# Altium PCB passwordManager.PcbDoc
Units mil, origin at the board's own origin, x right, y up, seen from the top; angles counter-clockwise.
Board outline 2340 x 1800 mil, 2 copper layers (Top Layer, Bottom Layer); 45 components, 29 nets, 171 pads, 15 vias.
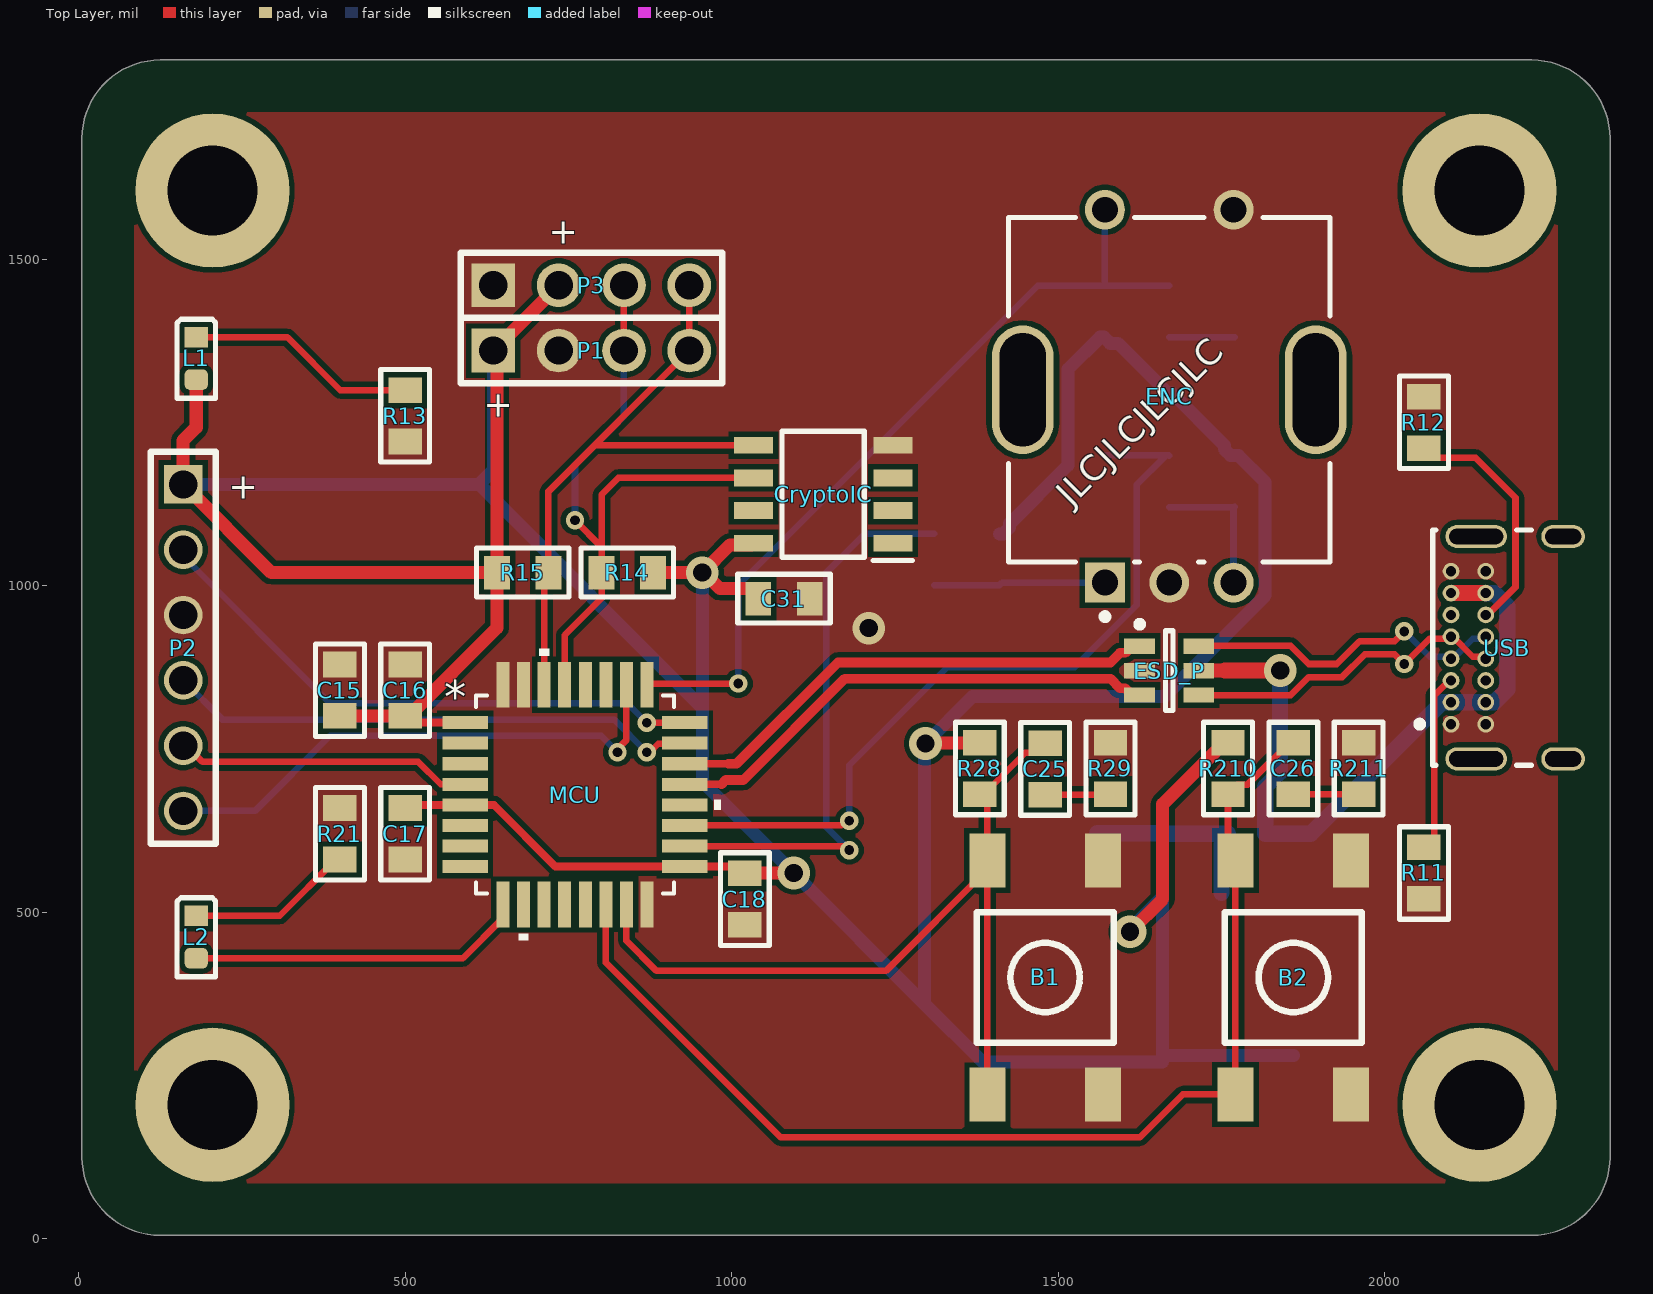
[diagram p0: Top Layer view]
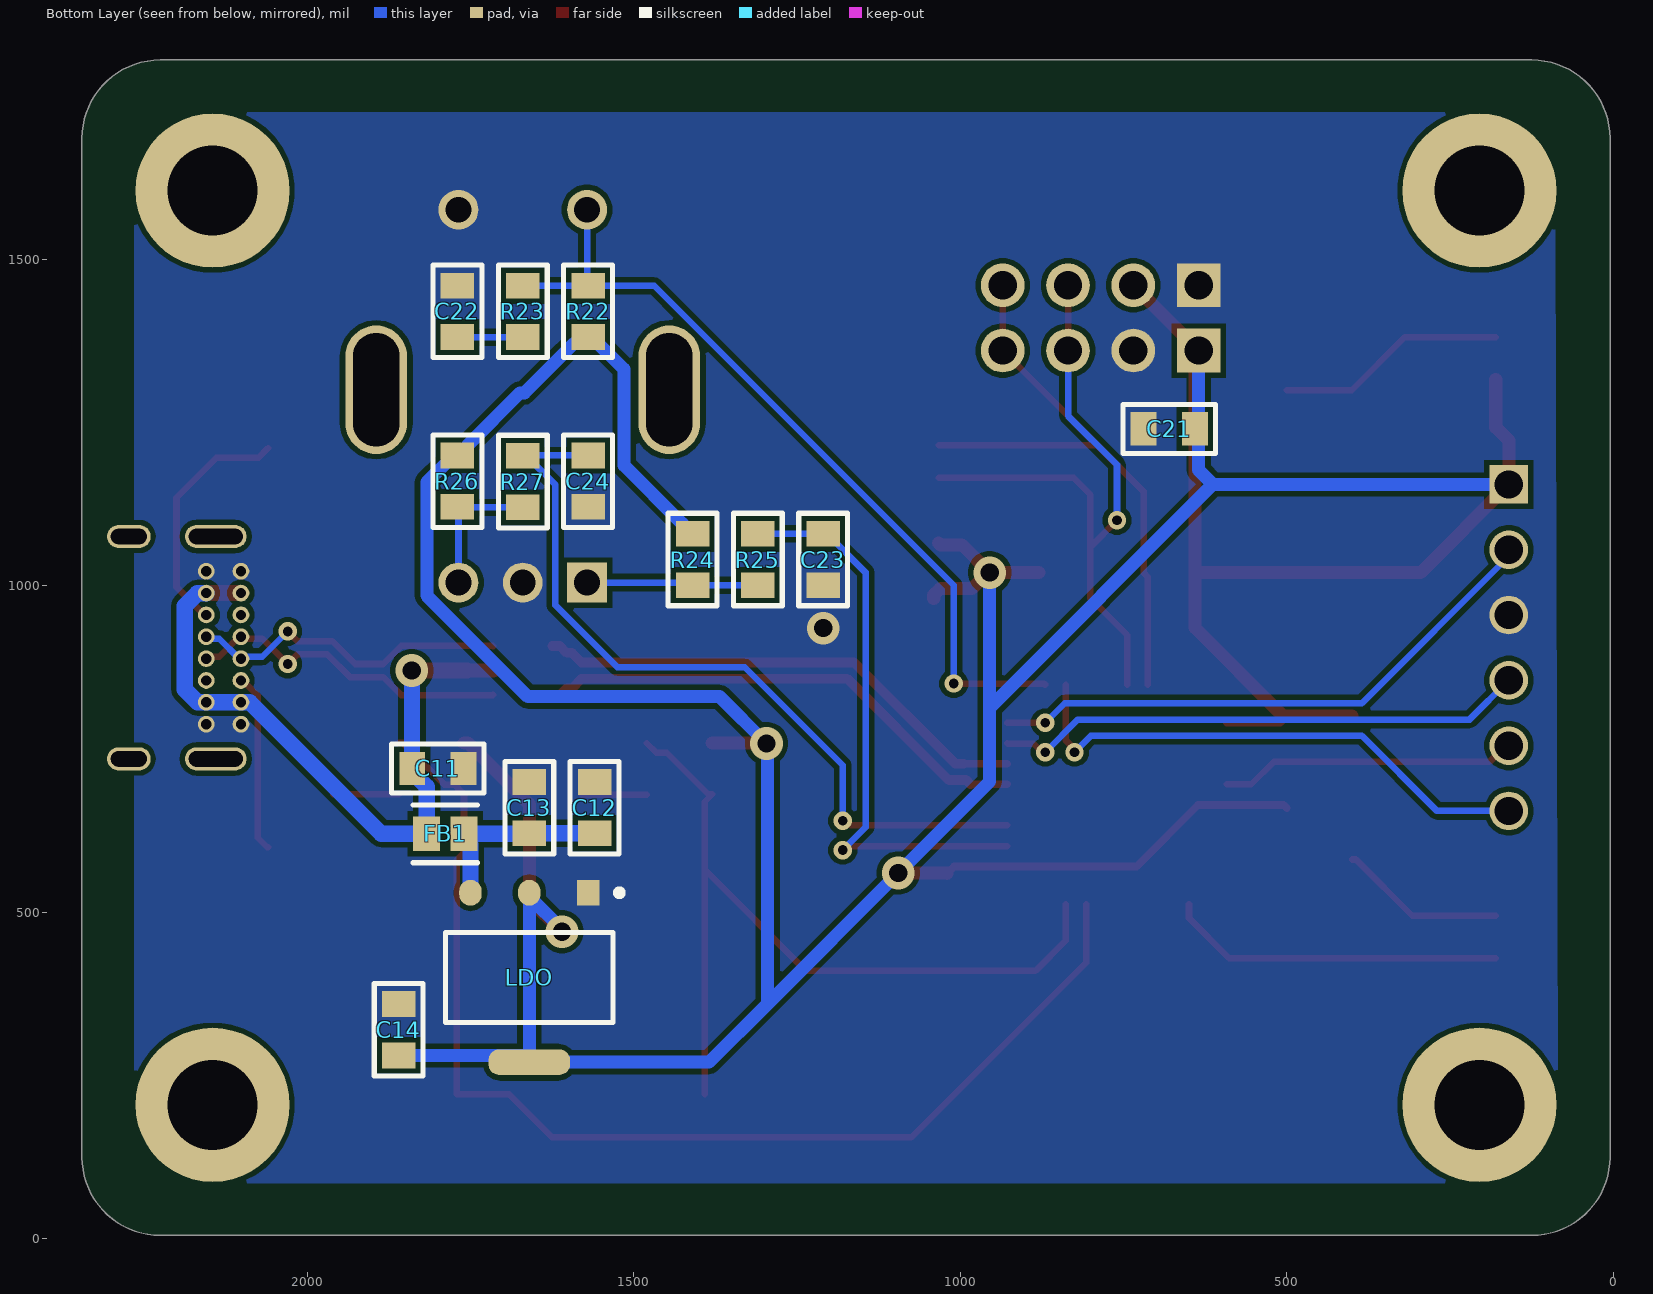
[diagram p1: Bottom Layer view, seen from below]
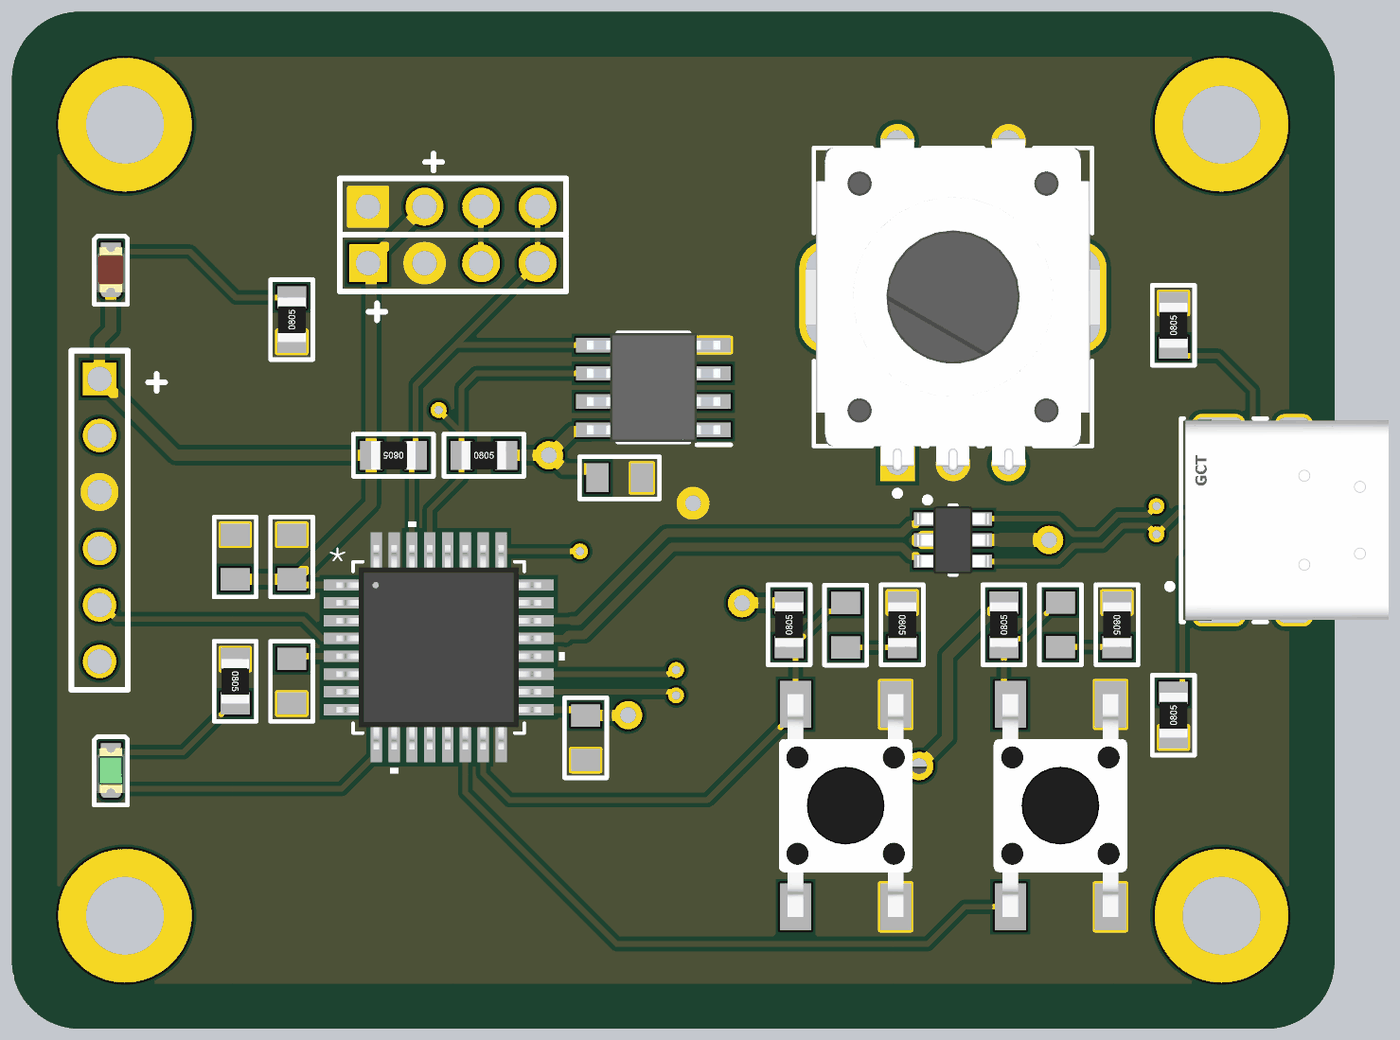
[diagram p2: 3D render of the assembled board from above, using the file's embedded part models]
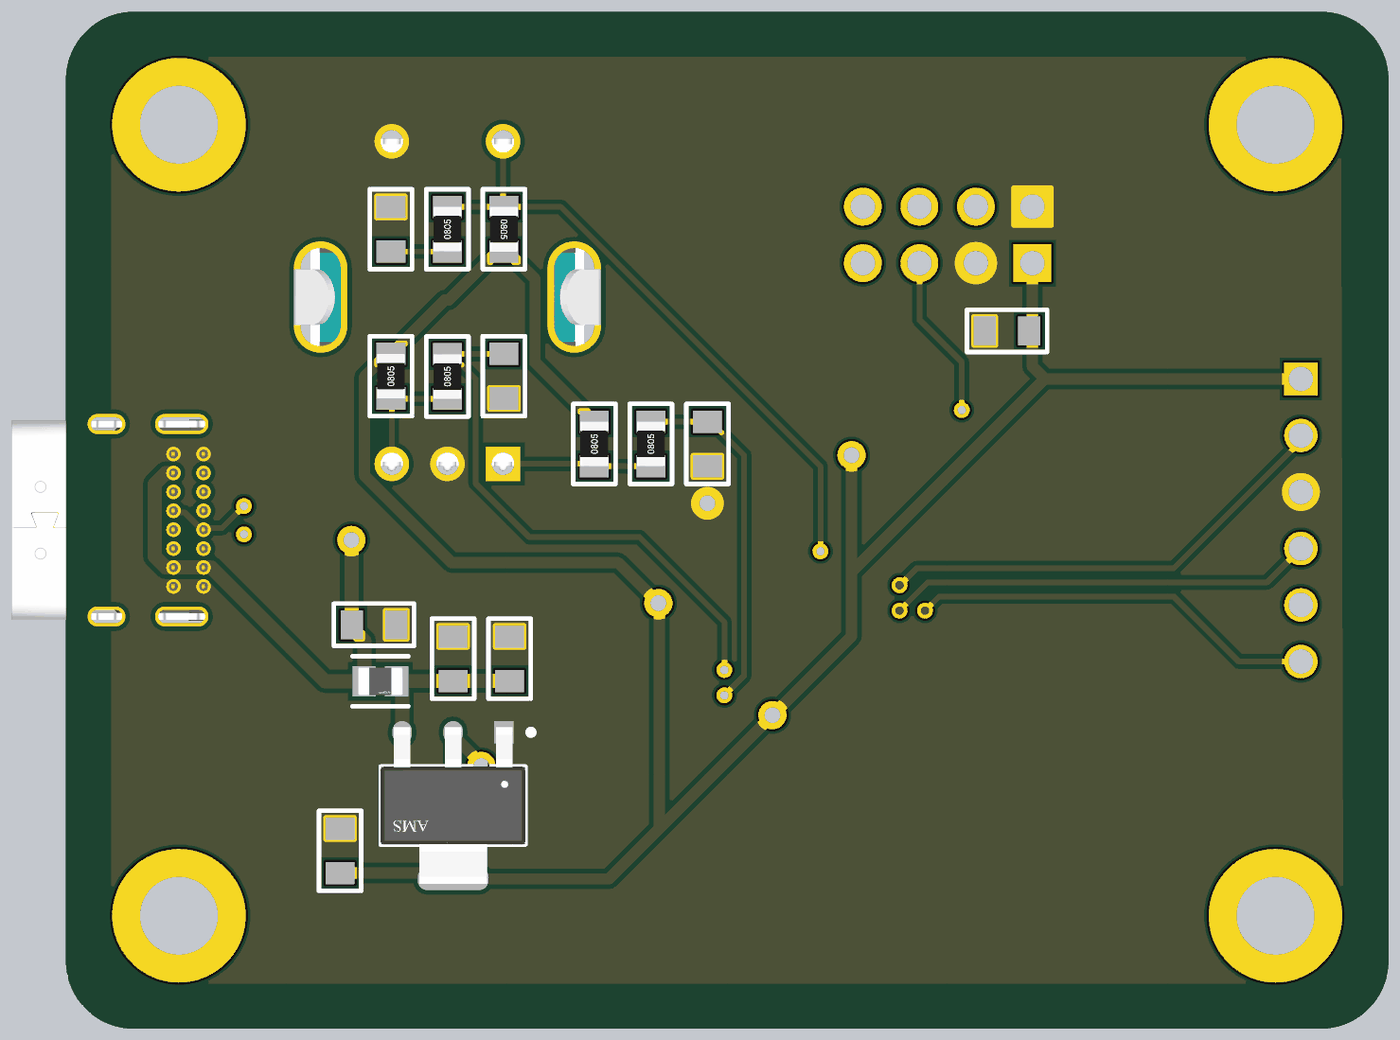
[diagram p3: 3D render of the assembled board from below, using the file's embedded part models]

## Layer stack, top to bottom
Top Solder: solder mask 0.4, Solder Resist, Dk 3.5
Top Layer: signal copper 1.4
Dielectric 1: dielectric 12.6, FR-4, Dk 4.8
Bottom Layer: signal copper 1.4
Bottom Solder: solder mask 0.4, Solder Resist, Dk 3.5

## Board outline
5,125 5,1685 cw(c125,1685) 125,1805 2225,1805 cw(c2225,1685) 2345,1685 2345,125 cw(c2225,125) 2225,5 125,5 cw(c125,125)

## Design rules (kind name [scope] priority, off if disabled: settings)
Clearance [All] p1: gap=7.87 ignorepadtopadclearanceinfootprint=FALSE
DiffPairsRouting [All] p1: maxlimit=10 minlimit=10 mostfreqgap=10 toplayer_minwidth=10 toplayer_maxwidth=15 toplayer_prefwidth=15 bottomlayer_minwidth=10 bottomlayer_maxwidth=15 bottomlayer_prefwidth=15 maxuncoupledlength=500
HoleSize [All] p1: absolutevalues=TRUE maxlimit=200 minlimit=10 maxpercent=80.000 minpercent=20.000
MinimumSolderMaskSliver [All] p1: minsoldermaskwidth=5
PolygonConnect [All] p1: connectstyle=Direct reliefconductorwidth=10 reliefentries=4 polygonreliefangle="90 Angle" airgapwidth=10
RoutingVias [All] p1: holewidth=15 width=28 viastyle="Through Hole" minholewidth=15 minwidth=28 maxholewidth=28 maxwidth=50
SMDNeckDown [All] p1: percent=100.000
SilkToSilkClearance [All] p1: silktosilkclearance=7.87
SilkToSolderMaskClearance [IsPad] p1: minsilkscreentomaskgap=7.87 clearancetoexposedcopper=TRUE
SolderMaskExpansion [All] p1: expansion=4 istentingtop=FALSE
Width [All] p1: maxlimit=50 minlimit=10 preferedwidth=10 minimp=50.000000 maximp=50.000000 favimp=50.000000
25 further rules are at their usual default settings.

## Classes and differential pairs
component class Pwr&MCU: C11 C12 C13 C14 C15 C16 C17 C18 ESD_P FB1 L1 LDO MCU R11 R12 R13 R14 R15 USB
component class Peripherals: 22 B1 B2 C21 C22 C23 C24 C25 C26 ENC L2 P1 P2 R21 R22 R23 R24 R25 R26 R27 R28 R29 R210 R211
component class cryptoIC: C31 CryptoIC
differential pair USB_D: +USB_D_P -USB_D_N
differential pair USB_CONN_D: +USB_CONN_D_P -USB_CONN_D_N

## Components (designator, comment, footprint, x,y, rotation, side; value= is the part's Value field where it differs from the comment)
B1 "Button" FP_BTN_SMD 1480,400 r0 top locked
B2 "Button" FP_BTN_SMD 1860,400 r0 top locked
C11 "2u2" FP_0805_CAP_085 1800,720 r0 bottom locked
C12 "2u2" FP_0805_CAP_085 1560,660 r270 bottom locked
C13 "22u" FP_0805_CAP_085 1660,660 r270 bottom locked
C14 "22u" FP_0805_CAP_085 1860,320 r270 bottom locked
C15 "4u7" FP_0805_CAP_085 400,840 r270 top locked
C16 "100n" FP_0805_CAP_085 500,840 r270 top locked
C17 "100n" FP_0805_CAP_085 500,620 r90 top locked
C18 "100n" FP_0805_CAP_085 1020,520 r90 top locked
C21 "100n" FP_0805_CAP_085 680,1240 r180 bottom locked
C22 "100n" FP_0805_CAP_085 1770,1420 r270 bottom locked
C23 "100n" FP_0805_CAP_085 1210,1040 r90 bottom locked
C24 "100n" FP_0805_CAP_085 1570,1160 r90 bottom locked
C25 "100n" FP_0805_CAP_085 1480,719.37 r90 top locked
C26 "100n" FP_0805_CAP_085 1860,720 r90 top locked
C31 "100n" FP_0805_CAP_085 1080,980 r180 top locked
CryptoIC "ATECC508A-SSHDA-B" SOIC127P600X175-8N 1140,1140 r180 top locked
ENC "PEC11R-4215F-S0024" FP-PEC11R-4215F-S0024-MFG 1670,1300 r0 top locked
ESD_P "USBLC6-2SC6" STM-SOT23-6L_V 1670,870 r0 top locked
FB1 "BLM21PG121SN1D" FP-BLM21-0_2-t0_85-e0_5-d-IPC_C 1788.57,620 r180 bottom locked
L1 "PWR_LED" FP_0805_LED_RED 180,1347.98 r90 top locked
L2 "U_LED" FP_0805_LED_GREEN 180,462.02 r90 top locked
LDO "AMS1117-3.3" FP-AMS1117-IPC_C 1660,400 r270 bottom locked
MCU "STM32L422KBT6" LQFP_422KBT6_STM 760,680 r0 top locked
P1 "Connector" FP_CONN4_TUSKE_254MM 635,1360 r270 top
P2 "Header" HEADER6x1 160,1155 r0 top locked
P3 "Connector" FP_CONN4_TUSKE_254MM 635,1460 r270 top (schematic designator P1)
R11 "5k1" FP_0805_RES 2060,560 r90 top locked
R12 "5k1" FP_0805_RES 2060,1250 r90 top locked
R13 "1k" FP_0805_RES 500,1260 r90 top locked
R14 "5k1" FP_0805_RES 840,1020 r0 top
R15 "5k1" FP_0805_RES 680,1020 r180 top
R21 "1k" FP_0805_RES 400,620 r270 top locked
R22 "5k1" FP_0805_RES 1570,1420 r270 bottom locked
R23 "100" FP_0805_RES 1670,1420 r90 bottom locked
R24 "5k1" FP_0805_RES 1410,1040 r90 bottom locked
R25 "5k1" FP_0805_RES 1310,1040 r90 bottom locked
R26 "5k1" FP_0805_RES 1770,1160 r90 bottom locked
R27 "5k1" FP_0805_RES 1670,1159.37 r90 bottom locked
R28 "5k1" FP_0805_RES 1380,720 r90 top locked
R29 "100" FP_0805_RES 1580,720 r270 top locked
R210 "5k1" FP_0805_RES 1760,720 r90 top locked
R211 "100" FP_0805_RES 1960,720 r270 top locked
USB "USB4085-GF-A" FP-USB4085-GF-A-MFG 2260,905 r90 top locked

## Footprints (in the part's own frame and the unit in brackets; to place one, negate y for a bottom-side part, rotate by r counter-clockwise, add the part's x,y. Pads: shape width x height; smd on the part's side, far side on the other; paste and mask are expansions set on the pad)
FP-AMS1117-IPC_C [mm]
  rect 1.004x0.872 smd paste+0 mask+0: 1(-3.295,2.29)
  rrect100% 1.004x0.872 smd paste+0 mask+0: 2(-3.295,0) 3(-3.295,-2.29)
  rrect87% 1.004x3.182 smd paste+0 mask+0: 4(3.295,0)
  silkscreen extent -3.42,-3.25 1.75,3.62, body extent -3.53,-3.25 3.53,3.25, height 1.8
FP-BLM21-0_2-t0_85-e0_5-d-IPC_C [mil]
  rect 41.53x53.39 smd paste+0 mask+0: 1(-28.57,0) 2(28.57,0)
  silkscreen extent -49,-44 49,44, body extent -39,-25 39,25, height 41
FP-PEC11R-4215F-S0024-MFG [mm]
  round 1.55 hole 1 paste-1000 mask+0: 1(-2.5,7) 2(2.5,7) B(2.5,-7.5) C(0,-7.5)
  rrect100% 2.4x5 hole 4.4 slot 1.8 at 0 deg paste-1000 mask+0: 3(-5.7,0) 4(5.7,0)
  rect 1.55x1.55 hole 1 paste-1000 mask+0: A(-2.5,-7.5)
  silkscreen extent -6.25,-8.95 6.25,6.7, body extent -7,-8.37 7,7.88, height 0.25
FP-USB4085-GF-A-MFG [mm]
  rrect100% 0.9x2.4 hole 2.1 slot 0.6 at 0 deg paste-1000 mask+0: 1(-4.325,3.045) 2(4.325,3.045)
  rrect100% 0.9x1.7 hole 1.4 slot 0.6 at 0 deg paste-1000 mask+0: 3(-4.325,-0.335) 4(4.325,-0.335)
  round 0.65 hole 0.4 paste-1000 mask+0: A1(-2.975,4.025) A4(-2.125,4.025) A5(-1.275,4.025) A6(-0.425,4.025) A7(0.425,4.025) A8(1.275,4.025) A9(2.125,4.025) A12(2.975,4.025) B1(2.975,2.675) B4(2.125,2.675) B5(1.275,2.675) B6(0.425,2.675) B7(-0.425,2.675) B8(-1.275,2.675) B9(-2.125,2.675) B12(-2.975,2.675)
  silkscreen extent -4.57,0.89 4.57,5.37, body extent -4.87,-4.83 4.87,4.83, height 0.25
FP_0805_CAP_085 [mm] "0805 kapacitás YAGEO 0.85mm magas"
  rect 1x1.3 smd: 1(-1,0) 2(1,0)
  silkscreen extent -1.8,-0.95 1.8,0.95, body extent -1,-0.64 1.03,0.64, height 0.85
FP_0805_LED_GREEN [mm] "0805 méretû zöld LED"
  rrect50% 0.8x0.9 smd: A(-0.825,0)
  rect 0.8x0.9 smd: K(0.825,0)
  silkscreen extent -1.55,-0.75 1.53,0.75, body extent -1.01,-0.63 1.01,0.62, height 1.1
FP_0805_LED_RED [mm] "0805 méretû piros LED"
  rrect50% 0.8x0.9 smd: A(-0.825,0)
  rect 0.8x0.9 smd: K(0.825,0)
  silkscreen extent -1.55,-0.75 1.53,0.75, body extent -1,-0.62 1.02,0.62, height 1.1
FP_0805_RES [mm] "0805 ellenállás"
  rect 1x1.3 smd: 1(-1,0) 2(1,0)
  silkscreen extent -1.8,-0.95 1.8,0.95, body extent -1,-0.62 1,0.63, height 0.62
FP_BTN_SMD [mm] "SMD Push Button 6x6mm"
  rect 1.4x2.1 smd: 1(2.25,4.55) 2(2.25,-4.55) 3(-2.25,4.55) 4(-2.25,-4.55)
  silkscreen extent -2.67,-2.54 2.67,2.54, body extent -3,-5 3,5, height 5.1
FP_CONN4_TUSKE_254MM [mm] "4×1 tüskesor"
  rect 1.7x1.7 hole 1.1: 1(0,0)
  round 1.7 hole 1.1: 2(0,2.54) 3(0,5.08) 4(0,7.62)
  silkscreen extent -1.27,-1.27 1.27,8.9, body extent -1.27,-1.27 1.27,8.89, height 8.54
HEADER6x1 [mm]
  rect 1.5x1.5 hole 1.1: 1(0,0)
  round 1.5 hole 1.1: 2(0,-2.54) 3(0,-5.08) 4(0,-7.62) 5(0,-10.16) 6(0,-12.7)
  silkscreen extent -1.27,-13.97 1.27,1.27
LQFP_422KBT6_STM [mil]
  rect 70x20 smd paste+0 mask+0: 1(-168.25,110.25) 2(-168.25,78.75) 3(-168.25,47.25) 4(-168.25,15.75) 5(-168.25,-15.75) 6(-168.25,-47.25) 7(-168.25,-78.75) 8(-168.25,-110.25) 17(168.25,-110.25) 18(168.25,-78.75) 19(168.25,-47.25) 20(168.25,-15.75) 21(168.25,15.75) 22(168.25,47.25) 23(168.25,78.75) 24(168.25,110.25)
  rect 20x70 smd paste+0 mask+0: 9(-110.25,-168.25) 10(-78.75,-168.25) 11(-47.25,-168.25) 12(-15.75,-168.25) 13(15.75,-168.25) 14(47.25,-168.25) 15(78.75,-168.25) 16(110.25,-168.25) 25(110.25,168.25) 26(78.75,168.25) 27(47.25,168.25) 28(15.75,168.25) 29(-15.75,168.25) 30(-47.25,168.25) 31(-78.75,168.25) 32(-110.25,168.25)
  silkscreen extent -152,-223 223,223, body extent -181,-181 181,181, height 63
SOIC127P600X175-8N [mm]
  rect 1.525x0.65 smd: 1(-2.712,1.905) 2(-2.712,0.635) 3(-2.712,-0.635) 4(-2.712,-1.905) 5(2.712,-1.905) 6(2.712,-0.635) 7(2.712,0.635) 8(2.712,1.905)
  silkscreen extent -3.48,-2.45 1.6,2.58, body extent -3,-2.45 3,2.45, height 1.75
STM-SOT23-6L_V [mm] "SOT23, 6-Leads, Body 3.05x1.75mm, Pitch 0.95mm"
  rect 1.2x0.6 smd: 1(-1.15,0.95) 2(-1.15,0) 3(-1.15,-0.95) 4(1.15,-0.95) 5(1.15,0) 6(1.15,0.95)
  silkscreen extent -1.27,-1.55 0.15,1.92, body extent -1.6,-1.53 1.6,1.53, height 1.45

## Part data
B1 B2: library part "Button 4P", "Push button"
C11 C12 C13 C14 C15 C16 C17 C18 C21 C22 C23 C24 C25 C26 C31: library part CAP, "Capacitor"
CryptoIC: "Integrated Circuit", Manufacturer_Name=Microchip, Mouser Part Number=556-ATECC508A-SSHDAB, Arrow Part Number=ATECC508A-SSHDA-B, Arrow Price/Stock=https://www.arrow.com/en/products/atecc508a-sshda-b/microchip-technology, Datasheet Link=http://ww1.microchip.com/downloads/en/DeviceDoc/20005928A.pdf, Height=1.75mm, Manufacturer_Part_Number=ATECC508A-SSHDA-B, Mouser Price/Stock=https://www.mouser.co.uk/ProductDetail/Microchip-Technology/ATECC508A-SSHDA-B?qs=1PHB%252BsnDjhE35x3AnwPadw%3D%3D
ENC: library part CMP-1747-00012-2, "ROTARY ENCODER MECHANICAL 24PPR", Max Operating Temperature=70°C, Min Operating Temperature=-30°C, Package Quantity=150, Built in Switch=Yes, Detent=Yes, Encoder Type=Mechanical, Height=13.4mm, Hole Diameter=1.8mm, Length=21.5mm, Mount="Through Hole", Number of Channels=2, Orientation=Vertical, Output Type=Quadrature, Packaging=Bulk, Pulses per Revolution=24, Radiation Hardening=No, REACH SVHC="No SVHC", RoHS Compliant=Yes, Series=PEC11R, Termination="PC Pins", Type=Mechanical, Width=12.5mm
ESD_P: library part CMP-2000-05378-1, "Very low capacitance ESD protection, 3.5 pF, -40 to 125 degC, 6-Pin SOT23, RoHS, Tape and Reel", Capacitance Value=3.5pF, Clamping Voltage=17V, Leakage Current=0.15uA, Manufacturer=STMicroelectronics, Operating Temp Range=-40Cto125C, Operating Temperature Classification=Automotive, Operating Temperature Max Deg. C=125C, Operating Temperature Min Deg. C=-40C, Package / Case=SOT-23, Package Description="6-Pin Small Outline Transistor, Body 2.925 x 1.625 mm, Pitch 0.95 mm", Package Reference=SOT23-6L, Peak Pulse Current=5A, Reverse Breakdown Voltage=6V, Reverse Stand-off Voltage=5V, Test Current (It)=1mA, Clamping Voltage (Max)=17V, Configuration=Dual, Datasheet URL=http://www.st.com/st-web-ui/static/active/en/resource/technical/document/datasheet/CD00050750.pdf, Datasheet Version="Rev. 5, 10/2011", Direction Type=Uni-Directional, Leakage Current (Max)=0.15uA, Manufacturer URL=http://www.st.com/, Mounting=SurfaceMount, Mounting Style=SurfaceMount, Number of Elements=1, Packaging=TapeandReel, Pin Count=6, Polarity=Uni-Directional, Product Depth (mm)=1.75mm, Product Height (mm)=1.3mm, Product Length (mm)=3.05mm, Rad Hardened=No, Suppressor Type=DiodeArrays, Working Voltage=5V, Working Voltage (Max)=5V
FB1: library part CMP-0686-00612-3, "Chip Ferrite Bead, 0805, 120Ω @ 100MHz, 0.03Ω, 25%, 3A", Case Code (Imperial)=0805, Case Code (Metric)=2012, Current Rating=3A, DC Resistance (DCR)=30mR, Max Operating Temperature=125°C, Min Operating Temperature=-55°C, Package Quantity=1, Test Frequency=100MHz, Tolerance=25%, Case/Package=0805, DC Resistance-Max=30mR, Depth=1.25mm, Height=0.85mm, Impedance=120R, Lead Free="Lead Free", Length=2mm, Material=Steel, Max Current Rating=3A, Max DC Current=3A, Number of Circuits=1, Number of Lines=1, Number of Pins=2, Packaging="Tape and Reel", REACH SVHC="No SVHC", RoHS Compliant=Yes, Series=BLM21P, Termination=SMD/SMT, Width=1.25mm
L1 L2: library part LED, "Typical RED GaAs LED"
LDO: library part CMP-209535-000001-1, "LDO Voltage Regulators 1A, 3.3V", Dropout Voltage=1.1V, Manufacturer="Advanced Monolithic Systems", Max Junction Temp=+125°C, Max Power Dissipation=1.2W, Max Supply Voltage=15V, Nominal Supply Current=5mA, Output Current=1A, Output Voltage=3.3V, Package=AMS1117, Temperature="-40°C to +125°C", Temperature Range Low=-40°C, Automotive=No, Category=IC, ComponentLink2Description=Datasheet, ComponentLink2URL=http://www.advanced-monolithic.com/pdf/ds1117.pdf, Device Class L1="Integrated Circuits (ICs)", Device Class L2="Power Management ICs", Device Class L3="Voltage Regulators - Linear", Height=1.8mm, Ipc Land Pattern Name=SOT229P700X180-4, Lead Free=Yes, Manufacturer Part Number=AMS1117-3.3, Number Of Outputs=1, Octopart=https://octopart.com/ams1117-3.3-advanced+monolithic+systems-25899300, Output Type=Fixed, RoHS=TRUE, Standoff Height=0.64mm, Temperature Range High=+125°C
MCU: "No Description Available", Mfr_Name=STMicroelectronics, Copyright="Copyright (C) 2023 Ultra Librarian. All rights reserved.", Manufacturer_Part_Number=STM32L422KBT6, RefDes=RefDes, Type=DEV
P1 P3: library part Header4
P2: library part Header6
R11 R12 R13 R14 R15 R21 R22 R23 R24 R25 R26 R27 R28 R29 R210 R211: library part RES, "Resistor"
USB: library part CMP-196119-000001-2, "CONN RCPT USB2.0 TYPE C 24POS RA", Contact Material="Copper Alloy", Contact Plating=Gold, Gender=Receptacle, Number of Positions=16, Orientation="Right Angle", USB Standard="USB 2.0"

## Free pads (board coordinates)
  round 236.22 hole 137.8: ""(205,205) ""(205,1605) ""(2145,205) ""(2145,1605)

## Via types
v1: diameter 28, hole 15, Top Layer to Bottom Layer, 9 vias
v2: diameter 50, hole 28, Top Layer to Bottom Layer, 6 vias

## Nets (pads, with @x,y where several pads share a name; then routed paths per layer and width w, separated by ;. In a path a pad name is that pad's centre, name@x,y a point inside that pad or via, vN(x,y) a via of type N, cw(c..) or ccw(c..) an arc to the next point about the centre after c; other vN are vias at no path point)
+3V3: C14.2 C15.2 C16.2 C17.2 C18.2 C21.2 C31.2 CryptoIC.8 L1.A LDO.2 LDO.4 MCU.1 MCU.5 MCU.17 P1.1 P2.1 P3.2 R14.2 R15.2 R22.2 R24.2 R26.2 R28.2 R210.2 | length 7813.9
  Top Layer w12: C17.2 504.88,664.25 MCU.5 635.75,664.25 730.25,569.75 MCU.17 1009.62,569.75 C18.2 ; C16.2 510.38,790.25 MCU.1
  Top Layer w20: L1.A 180,1242.38 160,1222.38 P2.1 295,1020 R15.2 ; C15.2 C16.2 505.91,800.63 640.63,935.35 R15.2 ; P3.2 P1.1 640.63,1354.37 R15.2 ; R14.2 v2(955,1020) ; C18.2 1020.32,559.68 1094.68,559.68 v2(1095,560) ; CryptoIC.8 1030.43,1062.2 997.2,1062.2 v2(955,1020) ; C31.2 1040.63,985.91 1030.94,995.59 981.72,995.59 957.31,1020 v2(955,1020) ; v2(1296.78,758.22) 1297.36,758.79 1379.42,758.79 R28.2 ; v2(1610,470) 1660,520 1660,665.28 1754.09,759.37 R210.2
  Bottom Layer w20: P2.1 613.08,1155 ; P1.1 635,1176.92 613.08,1155 ; v2(955,1020) 955,813.08 ; R24.2 1415.91,1079.37 1425.59,1089.06 1425.59,1094.96 1515,1184.37 1515,1331.54 1564.09,1380.63 R22.2 1579.69,1370.94 1591.5,1370.94 1667.44,1295 1674.37,1295 1754.41,1214.96 1754.41,1209.06 1764.09,1199.37 R26.2 1775.91,1199.37 1816.81,1158.46 1816.81,984.68 1662.13,830 1368.56,830 v2(1296.78,758.22) 1295,756.44 1295,360 ; v2(1610,470) 1610,473.56 LDO.2@1660,523.56 ; LDO.2 LDO.2@1660,523.56 ; LDO.4@1660.63,280.63 C14.2 ; 613.08,1155 955,813.08 ; 955,813.08 955,700 v2(1095,560) 1295,360 ; 1295,360 1384.72,270.28 LDO.4 LDO.2@1660,523.56
+5V: C12.2 C13.2 FB1.2 LDO.3 | length 294.6
  Bottom Layer w25: C12.2 C13.2 1660.32,620.32 1759.68,620.32 FB1.2 1760,614.07 1750.16,604.23 LDO.3
BTN1: B1.3 B1.4 C25.2 MCU.15 R28.1 | length 1288.5
  Top Layer w10: MCU.15 838.75,456.25 885,410 1236.06,410 B1.3@1391.42,565.35 ; B1.4 B1.3@1391.42,565.35 ; C25.2 1465.31,744.05 1449.33,744.05 1385.91,680.63 R28.1 1391.42,669.21 B1.3 B1.3@1391.42,565.35
BTN2: B2.3 B2.4 C26.2 MCU.14 R210.1 | length 1788.5
  Top Layer w10: MCU.14 807.25,422.75 1075,155 1625,155 1690.87,220.87 B2.4 B2.3 1760,590.55 R210.1 1774.69,695.32 1790.04,695.32 1854.09,759.37 C26.2
CC1: R11.2 USB.A5 | length 275
  Top Layer w10: R11.2 2061.18,599.37 2075.87,614.06 2075.87,831.97 2098.7,854.8 USB.A5
CC2: R12.1 USB.B5 | length 371.8
  Top Layer w10: R12.1 2074.69,1195.94 2139.06,1195.94 2200.24,1134.76 2200.24,997.91 2157.52,955.2 USB.B5
CHNA: ENC.A R24.1 R25.1 | length 263.3
  Bottom Layer w10: R25.1 R24.1 1414.09,1004.72 ENC.A
CHNB: ENC.B R26.1 R27.1 | length 215.9
  Bottom Layer w10: R27.1 R26.1@1769.37,1120 ; ENC.B 1768.43,1119.06 R26.1@1769.37,1120 ; R26.1 R26.1@1769.37,1120
E_CHN1: C23.2 MCU.18 R25.2 | length 883.6
  Top Layer w10: MCU.18 1168.88,601.25 1175.13,595 v1(1180,595)
  Bottom Layer w10: v1(1180,595) 1145,630 1145,1020.28 1204.09,1079.37 C23.2 R25.2
E_CHN2: C24.2 MCU.19 R27.2 | length 1228.5
  Top Layer w10: MCU.19 1167.88,632.75 1175.13,640 v1(1180,640)
  Bottom Layer w10: v1(1180,640) 1180,725 1330,875 1525,875 1620,970 1620,1154.65 R27.2@1664.09,1198.74 ; C24.2 1664.09,1199.37 1669.37,1199.37 R27.2
E_SW: ENC.1 MCU.25 R22.1 R23.2 | length 1258.4
  Top Layer w10: MCU.25 870.25,849 871.25,850 v1(1010,850)
  Bottom Layer w10: v1(1010,850) 1010,1000.61 1468.76,1459.37 R22.1 ; ENC.1 1571.57,1460.94 R22.1 ; R23.2 R22.1
GND: B1.1 B1.2 B2.1 B2.2 C11.1 C12.1 C13.1 C14.1 C15.1 C16.1 C17.1 C18.1 C21.1 C22.1 C23.1 C24.1 C31.1 CryptoIC.4 ENC.2 ENC.C ESD_P.2 LDO.1 MCU.16 MCU.31 MCU.32 P1.2 P2.3 P3.1 R11.1 R12.2 R13.1 R21.1 R29.1 R211.1 USB.A1 USB.A12 USB.B1 USB.B12
  other v2: 1210,935
NetC22_2: C22.2 R23.1 | length 100
  Bottom Layer w10: R23.1 C22.2
NetC25_1: C25.1 R29.2 | length 100.3
  Top Layer w10: C25.1 1579.37,680 R29.2
NetC26_1: C26.1 R211.2 | length 100
  Top Layer w10: C26.1 R211.2
NetL1_2: L1.K R13.2 | length 353.6
  Top Layer w10: L1.K 319.54,1380.46 400.63,1299.37 R13.2
NetL2_2: L2.K R21.2 | length 255.7
  Top Layer w10: L2.K 307.96,494.5 394.09,580.63 R21.2
NRST: MCU.4 P2.5 | length 456.3
  Top Layer w10: P2.5 164.69,755 189.69,730 520,730 554.25,695.75 MCU.4
SCL: CryptoIC.6 MCU.29 P1.3 P3.3 R14.1 | length 1006.2
  Top Layer w10: MCU.29 744.25,924.25 800.63,980.63 R14.1 800.63,1059.37 ; v1(760,1100) 800.63,1059.37 ; P1.3 P3.3 ; CryptoIC.6 826.26,1165 800.63,1139.37 800.63,1059.37
  Bottom Layer w10: v1(760,1100) 760,1185 835,1260 P1.3
SDA: CryptoIC.5 MCU.30 P1.4 P3.4 R15.1 | length 942
  Top Layer w10: MCU.30 712.75,1013.38 R15.1 719.37,1144.37 P1.4 P3.4 ; 795,1215 CryptoIC.5
SWCLK: MCU.24 P2.2 | length 884
  Top Layer w10: v1(870,790) 870.12,790.12 928.12,790.12 MCU.24
  Bottom Layer w10: P2.2 160,1045 385,820 840,820 v1(870,790)
SWDIO: MCU.23 P2.4 | length 819.5
  Top Layer w10: v1(870,745) 874.87,745 887.62,757.75 927.25,757.75 MCU.23
  Bottom Layer w10: P2.4 220,795 820,795 v1(870,745)
SWO: MCU.26 P2.6 | length 831.9
  Top Layer w10: v1(825,745) 825,749.87 838.75,763.62 MCU.26
  Bottom Layer w10: P2.6 270,655 385,770 800,770 v1(825,745)
U_LED: L2.A MCU.9 | length 516
  Top Layer w10: L2.A 588.29,429.54 649.75,491 MCU.9
USB_CONN_D_N: ESD_P.4 USB.A7 USB.B7 | length 503
  Top Layer w10: ESD_P.4 1715.75,832.13 1855.69,832.13 1883.56,860 1934.72,860 1969.72,895 2015,895 v1(2030,880) 2068.87,918.87 2098.67,918.87 USB.A7 2104.37,921.73 2134.85,891.25 2151.7,891.25 USB.B7
USB_CONN_D_P: ESD_P.6 USB.A6 USB.B6 | length 503
  Top Layer w10: ESD_P.6 1715.75,907.87 1855.69,907.87 1883.56,880 1926.44,880 1961.44,915 2015,915 v1(2030,930)
  Bottom Layer w10: v1(2030,930) 2068.87,891.13 2098.67,891.13 USB.A6 2104.37,888.27 2134.85,918.75 2151.7,918.75 USB.B6
USB_D_N: ESD_P.3 MCU.21 | length 773.8
  Top Layer w12: MCU.21 984.25,695.75
  Top Layer w15: 984.25,695.75 990.75,702.25 1017.78,702.25 1173.03,857.5 1580.05,857.5 1594.73,842.82 1602.7,842.82 1612.91,832.6 ESD_P.3
USB_D_P: ESD_P.1 MCU.22 | length 771.1
  Top Layer w12: MCU.22 995,727.25
  Top Layer w15: 995,727.25 1007.43,727.25 1162.68,882.5 1580.05,882.5 1594.73,897.18 1602.7,897.18 1612.91,907.4 ESD_P.1
VBUS: C11.2 ESD_P.5 FB1.1 USB.A4 USB.A9 USB.B4 USB.B9 | length 1068.8
  Top Layer w22: ESD_P.5 1755,870
  Top Layer w25: 1755,870 v2(1840,870) ; USB.A9 USB.B4
  Bottom Layer w25: v2(1840,870) 1839.68,869.68 1839.68,720.32 C11.2 1839.37,714.09 1817.14,691.86 FB1.1 1886.75,620 2088.09,821.34 USB.A4 USB.B9 2168.13,821.34 2187.85,841.06 2187.85,968.94 2168.24,988.55 2154.8,988.55 USB.B4
pads on no net: CryptoIC.1 CryptoIC.2 CryptoIC.3 CryptoIC.7 ENC.3 ENC.4 MCU.2 MCU.3 MCU.6 MCU.7 MCU.8 MCU.10 MCU.11 MCU.12 MCU.13 MCU.20 MCU.27 MCU.28 USB.1 USB.2 USB.3 USB.4 USB.A8 USB.B8

## Polygon pours and split planes (outlines as drawn)
GND on Top Layer "GND_L01_P001" (solid, pour order 1): 85,85 2265,85 2265,1725 85,1725
GND on Bottom Layer "GND_L02_P000" (solid, pour order 0): 84.68,85 2265,85 2265,1725 89.22,1725

## Silkscreen, mask and mechanical layers (free items; w line width, h text height)
Top Overlay:
  text "+" at 720,1523.44 h39.37
  text "+" at 620,1258.44 h39.37
  text "+" at 230,1133.44 h39.37
  text "JLCJLCJLCJLC" at 1520,1119.14 h39.37 r45
Mechanical 1:
  the board outline again, w10

## Text inside footprints (layer, text, board x,y; h text height)
MCU: Top Overlay "*" at 560,805 h50; Mechanical 13 "*" at 621,781 h50